# Altium PCB NTC_Arm.PcbDoc
Units mm, origin at the board's own origin, x right, y up, seen from the top; angles counter-clockwise.
Board outline 5 x 40 mm, 2 copper layers (Top Layer, Bottom Layer), stack 0.074 mm thick; 1 components, 2 nets, 4 pads, 0 vias.
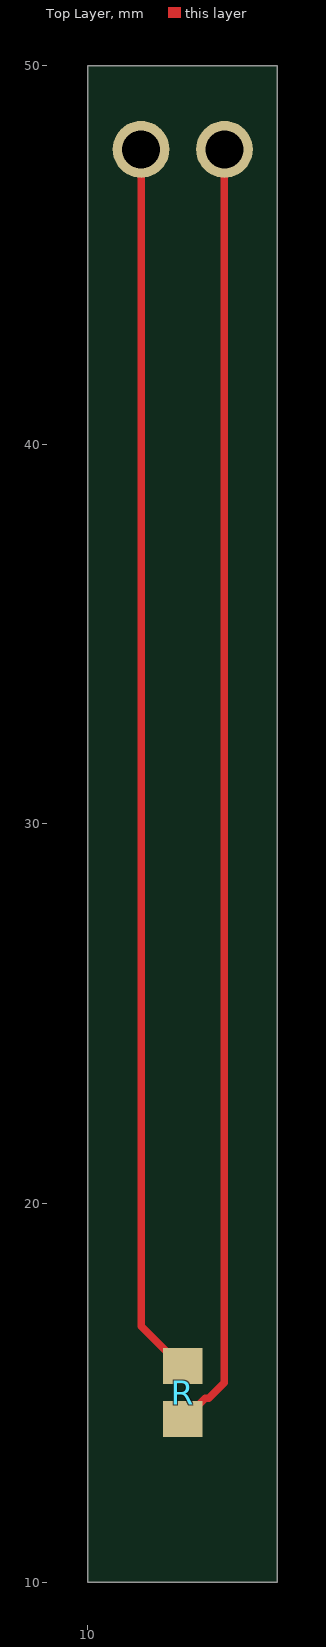
[diagram p0: Top Layer view]
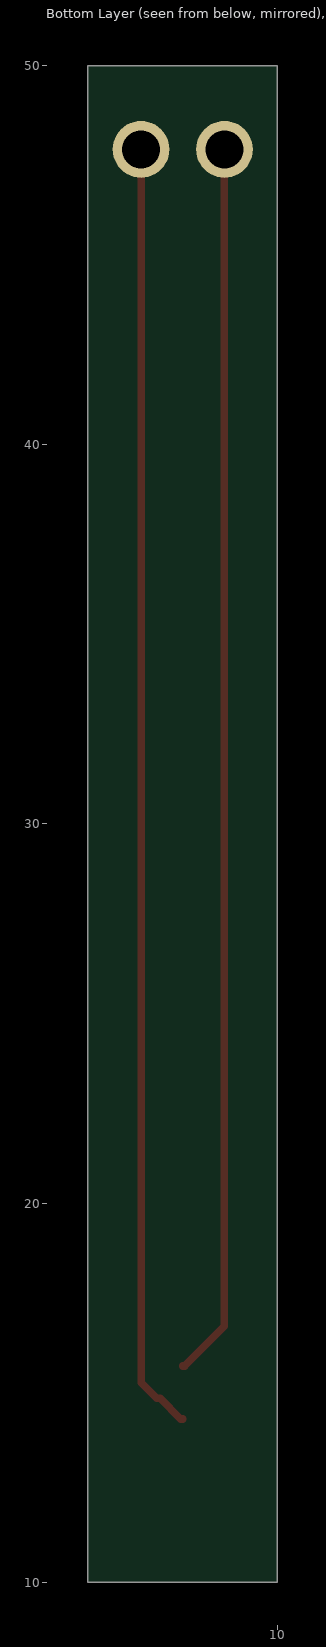
[diagram p1: Bottom Layer view, seen from below]

## Layer stack, top to bottom
Top Solder Mask: solder mask 0.025, SM-001, Dk 4
Adhesive 1: prepreg 0.025, PP-006, Dk 4.1
Top Layer: signal copper 0.018
Adhesive 2: prepreg 0.013, FR-4, Dk 4.8
Bottom Layer: signal copper 0.018
Bottom Solder Mask: solder mask 0.025, SM-001, Dk 4

## Board outline
10,10 15,10 15,50 10,50

## Design rules (kind name [scope] priority, off if disabled: settings)
Clearance [All] p1: gap=0.1 ignorepadtopadclearanceinfootprint=FALSE except(0.254: Arc-Text Track-Text SMDPad-Text THPad-Text Via-Text Fill-Text Poly-Text Region-Text Text-Text)
PolygonConnect [All] p1: connectstyle=Relief reliefconductorwidth=0.254 reliefentries=4 polygonreliefangle="90 Angle" airgapwidth=0.254
RoutingVias [All] p1: holewidth=0.5 width=1 viastyle="Through Hole" minholewidth=0.35 minwidth=0.55 maxholewidth=6 maxwidth=6.2
SolderMaskExpansion [All] p1: expansion=0.102 istentingtop=FALSE
Width [All] p1: maxlimit=2 minlimit=0.1 preferedwidth=0.2 minimp=50.000000 maximp=50.000000 favimp=50.000000
30 further rules are at their usual default settings.

## Components (designator, comment, footprint, x,y, rotation, side; value= is the part's Value field where it differs from the comment)
R "ERT-J1VR103J" RESC1608X90X30ML15T20 12.5,15 r270 top

## Footprints (in the part's own frame and the unit in brackets; to place one, negate y for a bottom-side part, rotate by r counter-clockwise, add the part's x,y. Pads: shape width x height; smd on the part's side, far side on the other; paste and mask are expansions set on the pad)
RESC1608X90X30ML15T20 [mm] "Chip Resistor, 2-Leads, Body 1.60x0.80mm, IPC Low Density"
  rect 0.95x1.05 smd: 1(-0.7,0) 2(0.7,0)
  body extent -0.88,-0.48 0.87,0.48, height 0.9

## Part data
R: library part CMP-2000-00869-1, Manufacturer=Panasonic, Part Number=ERT-J1VR103J

## Free pads (board coordinates)
  round 1.5 hole 1: 6(11.4,47.8) 7(13.6,47.8)

## Nets (pads, with @x,y where several pads share a name; then routed paths per layer and width w, separated by ;. In a path a pad name is that pad's centre, name@x,y a point inside that pad or via, vN(x,y) a via of type N, cw(c..) or ccw(c..) an arc to the next point about the centre after c; other vN are vias at no path point)
In: pad.6 R.1 | length 32.6
  Top Layer w0.2: pad.6 11.4,16.75 12.45,15.7 R.1
Out: pad.7 R.2 | length 34
  Top Layer w0.2: R.2 12.55,14.3 13.094,14.844 13.183,14.844 13.6,15.261 pad.7

## Silkscreen, mask and mechanical layers (free items; w line width, h text height)
Board Outline:
  the board outline again, w0.1